# EAGLE board ESP32 Display 2.8 inch V1.2 (EAGLE 9.5.1), part 1 of 2
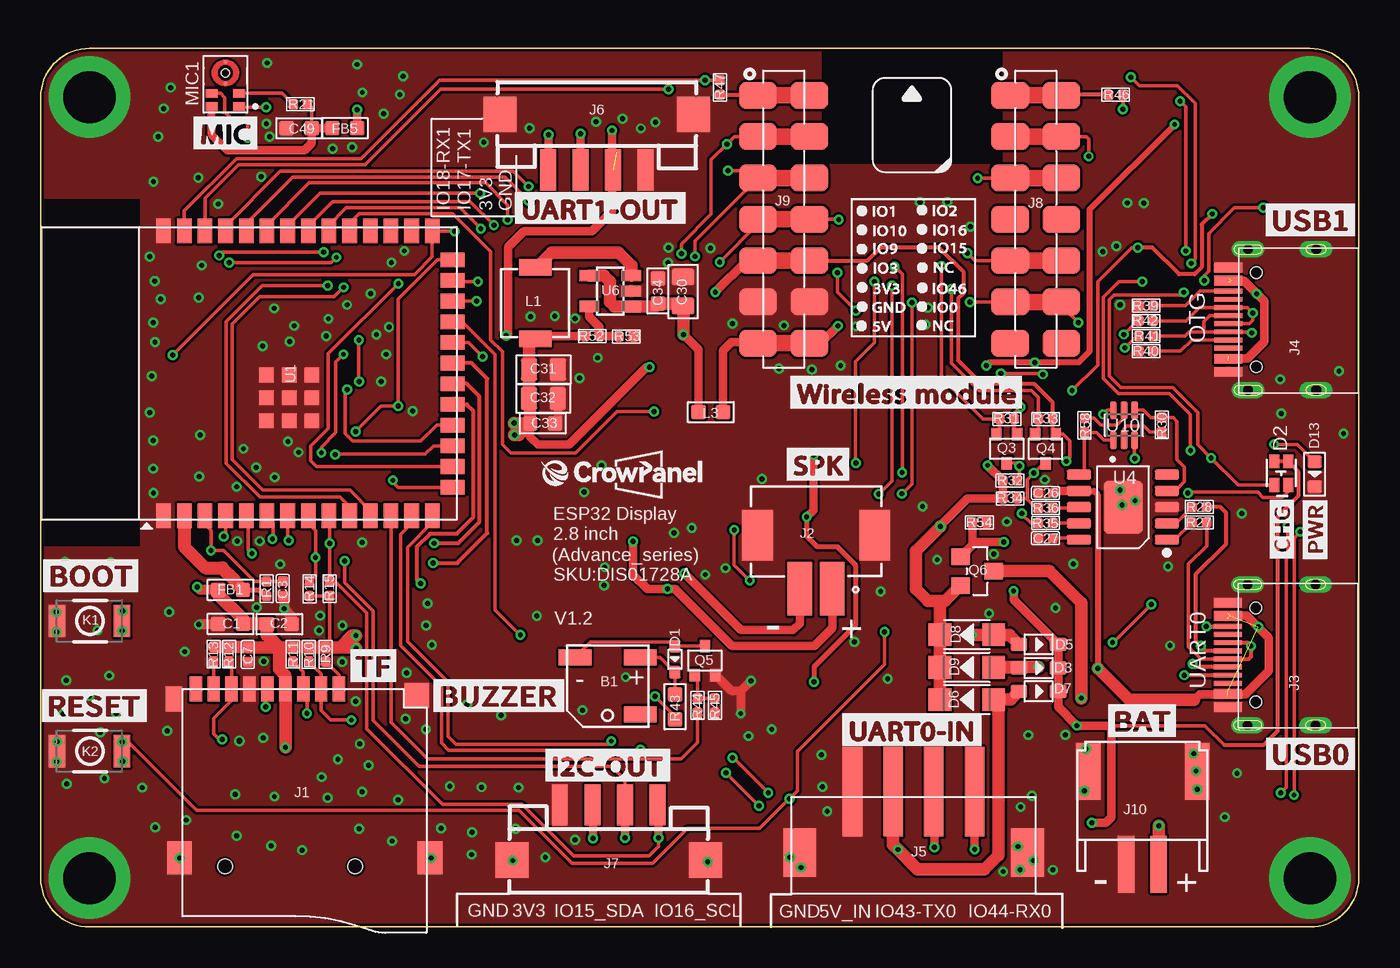
[diagram p0: board, top side]
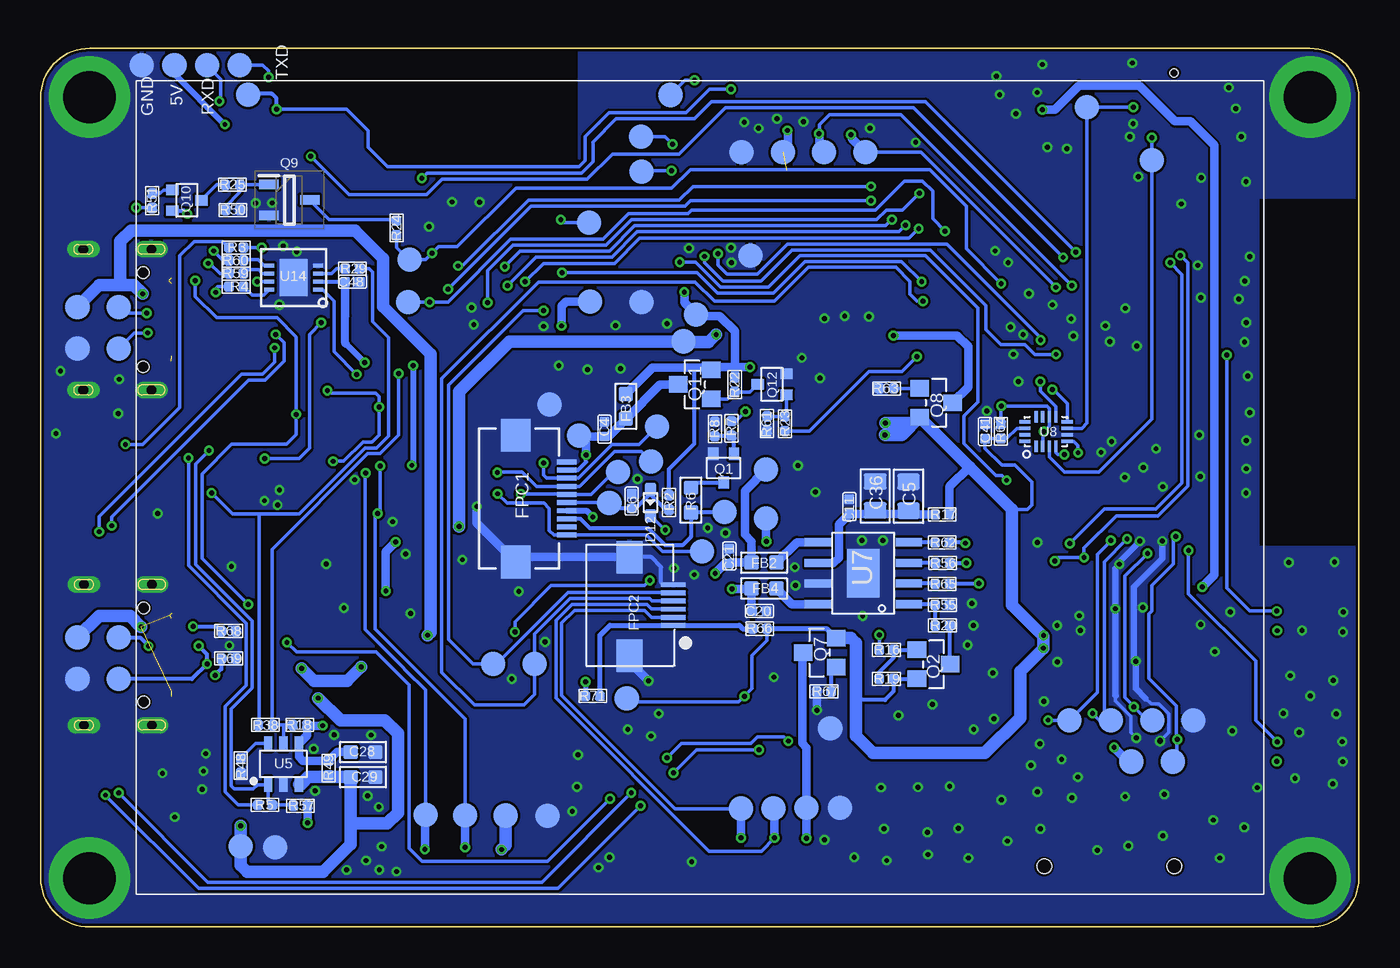
[diagram p1: board, bottom side, seen from below]

Size 81 x 54 mm. Coordinates in mm from the lower left corner, seen from the top.
Outline: 0,51 0,3 arc90 3,0 78,0 arc90 81,3 81,51 arc90 78,54 3,54 arc90 0,51
Copper layers (1*16): Top 0.035mm / dielectric 1.5mm / Bottom 0.035mm
Design rules "default": minimum track width 8mil, minimum drill 0.3mm, track to track 6mil, track to pad 6mil, pad to pad 4mil, via to via 6mil, smd to smd 6mil, copper to edge 6mil, drill to drill 4mil, minimum pad ring 6mil, minimum via ring 6mil, stop-mask expansion 4mil, vias tented up to drill 100mil, thermal gap 0mil
tRestrict: area 0.1,23.4 to 6.1,44.7; area 48,46.9 to 59.1,54
bRestrict: area 0.1,23.4 to 6.1,44.7; area 48,46.9 to 59.1,54

## Footprints (pad centres in the part's own frame; a part is rotated, then mirrored left to right if it is on the bottom)
BEEP_5025 = smd 2 x 1: 1 -2,-1.75; 2 2,-1.75; 3 -2,1.75
C0603 = smd 0.889 x 0.889: 1 -0.762,0; 2 0.762,0
C0402 = smd 0.6 x 0.6: 1 -0.45,0; 2 0.45,0
C0805 = smd 1.016 x 1.397: 1 -0.889,0; 2 0.889,0
D_SOD523 = smd 0.762 x 0.7: + -0.8,0; - 0.8,0
LED_KT-0603RYG = smd 0.85 x 0.6: 1 0.725,-0.425; 2 0.725,0.425; 3 -0.725,-0.425; 4 -0.725,0.425
D_SOD323 = smd 1 x 0.8: + -1.2,0; - 1.2,0
D_SOD123FL = smd 1.397 x 1.397: + -1.651,0; - 1.651,0
LED0603 = smd 0.762 x 0.889: + -0.762,0; - 0.762,0
L0603 = smd 0.889 x 0.889: 1 -0.762,0; 2 0.762,0
FPC-P0.5MM-10P-SMD = smd 0.3 x 1.2: P$1 2.25,-1.574; P$2 1.75,-1.574; P$3 1.25,-1.574; P$4 0.75,-1.574; P$5 0.25,-1.574; P$6 -0.25,-1.574; P$7 -0.75,-1.574; P$8 -1.25,-1.574; P$9 -1.75,-1.574; P$10 -2.25,-1.574 | smd 2 x 1.8: P$11 3.9,1.576; P$12 -3.9,1.576
FPC-6PIN-0.5MM_2 = smd 0.3 x 1.5: 1 1.183,2.184; 2 0.683,2.184; 3 0.183,2.184; 4 -0.317,2.184; 5 -0.817,2.184; 6 -1.317,2.184 | smd 2 x 1.6: 7 -3.01,-0.496; 8 3.036,-0.496
9P-SMD-W/-RING = smd 1.524 x 0.762: 1 0,4.4; 2 0,3.3; 3 0,2.2; 4 0,1.1; 5 0,0; 6 0,-1.1; 7 0,-2.2; 8 0,-3.3; 9 0,-4.4 | smd 1.524 x 1.016: G1 0.6,-5.746 | smd 2.032 x 1.524: G2 10.373,-5.4; G3 10.373,10 | smd 1.524 x 1.524: G4 0.392,9.181 | hole 0.889: 10.9,-2.6; 10.9,5.4
CONN-TH_2P-P2.00_XUNPU_WAFER-PH2.0-2PLB = smd 1.5 x 3.3: 1 -1,1.65; 2 1,1.65 | smd 1.9 x 3.1: 3 3.6,-1.65; 4 -3.6,-1.65
USB-3.0TYPEC-SMD = smd 0.3 x 1.7: A1 -3.35,0.5; A4 -2.55,0.5; A5 -1.25,0.5; A6 -0.25,0.5; A7 0.25,0.5; A8 1.25,0.5; A9 2.55,0.5; A12 3.35,0.5; B1 3.05,0.5; B4 2.25,0.5; B5 1.75,0.5; B6 0.75,0.5; B7 -0.75,0.5; B8 -1.75,0.5; B9 -2.25,0.5; B12 -3.05,0.5 | drill 0.6 pad 1.016 long: P$1 -4.325,-0.72; P$2 4.325,-0.72; P$3 -4.325,-4.9; P$4 4.325,-4.9 | hole 0.68: -2.89,-1.22; 2.89,-1.22
XH2.54-4P-SMD = smd 1.2 x 5.5: 1 -3.75,-1.875; 2 -1.25,-1.875; 3 1.25,-1.875; 4 3.75,-1.875 | smd 2 x 3: 5 -7,1.875; 6 7,1.875
CONNECTOR_4P-SMD-2.0 = smd 0.965 x 2.54: 1 -3,0; 2 -1,0; 3 1,0; 4 3,0 | smd 2.032 x 2.184: SS1 -5.946,3.4; SS2 5.946,3.4
H7-2.54-18.28X2.5X5MM = smd 1.65 x 2.3: 1 -7.62,-1.58; 1-1 -7.62,1.58; 2 -5.08,-1.58; 2-2 -5.08,1.58; 3 -2.54,-1.58; 3-3 -2.54,1.58; 4 0,-1.58; 4-4 0,1.58; 5 2.54,-1.58; 5-5 2.54,1.58; 6 5.08,-1.58; 6-6 5.08,1.58; 7 7.62,-1.58; 7-7 7.62,1.58
PH2.0WT-2PIN = smd 1 x 3.5: P$1 -1,0; P$2 1,0 | smd 1.5 x 3.5: P$3 -3.35,-5.7; P$4 3.35,-5.7
TEST-PIN-4-2.0MM = smd 1.5 x 1.5: 1 -3,0; 2 -1,0; 3 1,0; 4 3,0
THO-M3.2*5MM-HOLE = drill 3.2 pad 5: P$1 0,0
157SW = smd 1.016 x 1.981: 1 0,0; 2 4,0
L0420 = smd 2 x 1: 1 0,2.2; 2 0,-2.2
MIC-SMD_5P-L3.5-W2.7-P1.67 = smd 0.725 x 0.522: 1 -0.838,1.362; 2 -0.838,0.542; 3 0.838,0.542; 4 0.838,1.362 | smd 0.25 x 0.25: 5_1 0,-0.048; 5_2 0,-1.373 | hole 0.5: 0,-0.71
TEST_PAD-1.5MM = smd 1.5 x 1.5: P$1 0,0
MOS_SOT323 = smd 0.635 x 0.762: 1 -0.635,-0.889; 2 0.635,-0.889; 3 0,0.889
PMOS_SOT23 = smd 1.016 x 1.143: 1 -0.889,-1.016; 2 0.889,-1.016; 3 0,1.016
SOT95P280X125-3N = smd 1.2 x 0.6: 1 -1.25,0.95; 2 -1.25,-0.95; 3 1.25,0
R0402 = smd 0.635 x 0.635: 1 -0.445,0; 2 0.445,0
R0603-SP = smd 0.889 x 0.889: 1 -0.762,0; 2 0.762,0
ESP32-S3-WROOM-1-SMD41 = smd 1.5 x 0.9: 1 -8.75,5.26; 2 -8.75,3.99; 3 -8.75,2.72; 4 -8.75,1.45; 5 -8.75,0.18; 6 -8.75,-1.09; 7 -8.75,-2.36; 8 -8.75,-3.63; 9 -8.75,-4.9; 10 -8.75,-6.17; 11 -8.75,-7.44; 12 -8.75,-8.71; 13 -8.75,-9.98; 14 -8.75,-11.25; 27 8.75,-11.25; 28 8.75,-9.98; 29 8.75,-8.71; 30 8.75,-7.44; 31 8.75,-6.17; 32 8.75,-4.9; 33 8.75,-3.63; 34 8.75,-2.36; 35 8.75,-1.09; 36 8.75,0.18; 37 8.75,1.45; 38 8.75,2.72; 39 8.75,3.99; 40 8.75,5.26 | smd 0.9 x 1.5: 15 -6.985,-12.5; 16 -5.715,-12.5; 17 -4.445,-12.5; 18 -3.175,-12.5; 19 -1.905,-12.5; 20 -0.635,-12.5; 21 0.635,-12.5; 22 1.905,-12.5; 23 3.175,-12.5; 24 4.445,-12.5; 25 5.715,-12.5; 26 6.985,-12.5 | smd 0.9 x 0.9: 41 -2.9,-1.06; 42 -1.5,-1.06; 43 -0.1,-1.06; 44 -2.9,-2.46; 45 -1.5,-2.46; 46 -0.1,-2.46; 47 -2.9,-3.86; 48 -1.5,-3.86; 49 -0.1,-3.86
ESOP-10-EP-150MIL = smd 1.5 x 0.6: 1 -2.7,2; 2 -2.7,1; 3 -2.7,0; 4 -2.7,-1; 5 -2.7,-2; 6 2.7,-2; 7 2.7,-1; 8 2.7,0; 9 2.7,1; 10 2.7,2 | smd 2.4 x 3.2: EP 0,0
SOT23-6L = smd 0.5 x 0.9: 1 -0.961,-1.212; 2 -0.011,-1.212; 3 0.94,-1.212; 4 0.94,1.288; 5 -0.011,1.288; 6 -0.961,1.288
IC_SOT23-5 = smd 0.69 x 1.2: 1 -0.95,-1.3; 2 0,-1.3; 3 0.95,-1.3; 4 0.95,1.3; 5 -0.95,1.3
NS4168-ESOP-8 = smd 1.6 x 0.5: 1 -2.8,1.905; 2 -2.8,0.635; 3 -2.8,-0.635; 4 -2.8,-1.905; 5 2.8,-1.905; 6 2.8,-0.635; 7 2.8,0.635; 8 2.8,1.905 | smd 2 x 3: 9 0,0
IC_SGM3799_TQFN2.6X1.8_16L = smd 0.2 x 0.7: 1 -0.6,-0.9; 2 -0.2,-0.9; 3 0.2,-0.9; 4 0.6,-0.9; 9 0.6,0.9; 10 0.2,0.9; 11 -0.2,0.9; 12 -0.6,0.9 | smd 0.7 x 0.2: 5 1.3,-0.6; 6 1.3,-0.2; 7 1.3,0.2; 8 1.3,0.6; 13 -1.3,0.6; 14 -1.3,0.2; 15 -1.3,-0.2; 16 -1.3,-0.6
SOP65P210X100-6N = smd 1.09 x 0.4: 1 -0.92,0.65; 2 -0.92,0; 3 -0.92,-0.65; 4 0.92,-0.65; 5 0.92,0; 6 0.92,0.65
DFN8 = smd 0.61 x 0.25: 1 -1.5,0.75; 2 -1.5,0.25; 3 -1.5,-0.25; 4 -1.5,-0.75; 5 1.5,-0.75; 6 1.5,-0.25; 7 1.5,0.25; 8 1.5,0.75 | smd 1.7 x 2.3: P$9 0,0

## Placement (x,y rotation side)
B1  BEEP_5025  [BEEP_5025]  34.84,14.81 180 top
C1  10uF/0603  [C0603]  11.67,18.62 0 top
C2  100nF/0603  [C0603]  14.67,18.61 180 top
C3  1uF  [C0402]  14.88,20.79 90 top
C4  100nF  [C0402]  46.35,30.59 270 bottom
C5  47uF/0805  [C0805]  27.67,26.47 90 bottom
C6  1uF  [C0402]  44.68,26.17 270 bottom
C7  1uF  [C0402]  12.73,16.74 90 top
C11  100nF  [C0402]  31.31,25.83 90 bottom
C20  1nF  [C0402]  36.83,19.41 180 bottom
C21  1nF  [C0402]  38.68,22.79 270 bottom
C26  1uF  [C0402]  61.75,26.67 0 top
C27  1uF  [C0402]  61.75,23.89 0 top
C28  1uF/0603  [C0603]  61.2,10.75 180 bottom
C29  10uF/0603/NC  [C0603]  61.19,9.21 180 bottom
C30  22uF/0805  [C0805]  39.47,39.05 270 top
C31  22uF/0805  [C0805]  30.9,34.25 180 top
C32  22uF/0805  [C0805]  30.89,32.48 180 top
C33  1uF/0603  [C0603]  30.85,30.95 180 top
C34  1uF/0603  [C0603]  37.93,39.08 270 top
C36  47uF/0805  [C0805]  29.72,26.49 90 bottom
C41  1uF  [C0402]  22.97,30.45 270 bottom
C48  1uF  [C0402]  61.84,39.65 180 bottom
C49  100nF  [C0603]  15.88,49.09 0 top
D1  B5819WT  [D_SOD523]  38.97,16.45 270 top
D2  KT-0603RYG  [LED_KT-0603RYG]  76.23,27.89 90 top
D3  1N5817WS  [D_SOD323]  61.32,15.91 0 top
D5  1N5817WS  [D_SOD323]  61.32,17.36 0 top
D6  DSS34  [D_SOD123FL]  56.91,13.97 180 top
D7  1N5817WS  [D_SOD323]  61.32,14.48 0 top
D8  DSS34  [D_SOD123FL]  56.91,17.96 180 top
D9  DSS34  [D_SOD123FL]  56.91,15.95 180 top
D12  B5819WT  [D_SOD523]  43.53,26.08 270 bottom
D13  Red  [LED0603]  78.29,27.82 270 top
FB1  0R/800mA  [L0603]  11.67,20.71 0 top
FB2  1K/300mA  [L0603]  36.55,22.39 180 bottom
FB3  0R/800mA  [L0603]  45.04,31.99 270 bottom
FB4  1K/300mA  [L0603]  36.55,20.8 180 bottom
FB5  0R/800mA  [L0603]  18.69,49.09 180 top
FPC1  TFT-2.4/2.8LCD-SPI-10P  [FPC-P0.5MM-10P-SMD]  50.23,26.33 90 bottom
FPC2  FPC-6PIN-0.5MMFPC-6PIN-0.5MM_2  [FPC-6PIN-0.5MM_2]  44.31,19.72 270 bottom
J1  [9P-SMD-W/-RING]  13.93,14.62 270 top
J2  WAFER-PH2.0-2PLB  [CONN-TH_2P-P2.00_XUNPU_WAFER-PH2.0-2PLB]  47.65,22.43 180 top
J3  TYPEC-3.0-16P-SMD  [USB-3.0TYPEC-SMD]  73.45,16.72 90 top
J4  TYPEC-3.0-16P-SMD  [USB-3.0TYPEC-SMD]  73.48,37.32 90 top
J5  XH2.54-4P-SMT  [XH2.54-4P-SMD]  53.63,6.44 180 top
J6  HY2.0-4P-SMT  [CONNECTOR_4P-SMD-2.0]  34.17,46.52 0 top
J7  HY2.0-4P-SMT  [CONNECTOR_4P-SMD-2.0]  34.91,7.51 180 top
J8  [H7-2.54-18.28X2.5X5MM]  61.15,43.49 270 top
J9  [H7-2.54-18.28X2.5X5MM]  45.66,43.49 270 top
J10  PH2.0WT-2PIN  [PH2.0WT-2PIN]  67.7,3.86 180 top
J11  HC-PZ200-8.7L-1X4PZ1  [TEST-PIN-4-2.0MM]  71.78,52.97 180 bottom
J12  THO-M3.25MM-HOLE  [THO-M3.2*5MM-HOLE]  3,3 0 bottom
J13  THO-M3.25MM-HOLE  [THO-M3.2*5MM-HOLE]  78,3 0 top
J14  THO-M3.25MM-HOLE  [THO-M3.2*5MM-HOLE]  78,51 0 top
J15  THO-M3.25MM-HOLE  [THO-M3.2*5MM-HOLE]  3,51 0 top
K1  BUTTON  [157SW]  1,18.8 0 top
K2  BUTTON  [157SW]  1,10.8 0 top
L1  4.7uH/3A  [L0420]  30.38,38.34 0 top
L3  NC  [L0603]  41.18,31.64 180 top
MIC1  LMD3526B261-OFA01  [MIC-SMD_5P-L3.5-W2.7-P1.67]  11.35,51.78 180 top
P1  TEST_PADPAD-1.5MM  [TEST_PAD-1.5MM]  44.98,14.05 270 bottom
P2  TEST_PADPAD-1.5MM  [TEST_PAD-1.5MM]  35.96,7.3 270 bottom
P3  TEST_PADPAD-1.5MM  [TEST_PAD-1.5MM]  37.96,7.27 270 bottom
P4  TEST_PADPAD-1.5MM  [TEST_PAD-1.5MM]  50.66,16.17 90 bottom
P5  TEST_PADPAD-1.5MM  [TEST_PAD-1.5MM]  53.2,16.17 90 bottom
P6  TEST_PADPAD-1.5MM  [TEST_PAD-1.5MM]  32.48,12.21 270 bottom
P7  TEST_PADPAD-1.5MM  [TEST_PAD-1.5MM]  47.92,30.19 0 bottom
P8  TEST_PADPAD-1.5MM  [TEST_PAD-1.5MM]  46.06,26.06 0 bottom
P9  TEST_PADPAD-1.5MM  [TEST_PAD-1.5MM]  43.49,28.62 0 bottom
P10  TEST_PADPAD-1.5MM  [TEST_PAD-1.5MM]  40.36,23.07 0 bottom
P11  TEST_PADPAD-1.5MM  [TEST_PAD-1.5MM]  45.52,27.95 0 bottom
P12  TEST_PADPAD-1.5MM  [TEST_PAD-1.5MM]  43.12,30.75 0 bottom
P13  TEST_PADPAD-1.5MM  [TEST_PAD-1.5MM]  47.3,43.29 180 bottom
P14  TEST_PADPAD-1.5MM  [TEST_PAD-1.5MM]  44.07,46.43 180 bottom
P15  TEST_PADPAD-1.5MM  [TEST_PAD-1.5MM]  38.99,25.5 0 bottom
P16  TEST_PADPAD-1.5MM  [TEST_PAD-1.5MM]  49.72,32.12 0 bottom
P17  TEST_PADPAD-1.5MM  [TEST_PAD-1.5MM]  13.97,10.16 0 bottom
P18  TEST_PADPAD-1.5MM  [TEST_PAD-1.5MM]  33.94,7.31 0 bottom
P19  TEST_PADPAD-1.5MM  [TEST_PAD-1.5MM]  17.78,12.7 0 bottom
P20  TEST_PADPAD-1.5MM  [TEST_PAD-1.5MM]  15.24,12.7 0 bottom
P21  TEST_PADPAD-1.5MM  [TEST_PAD-1.5MM]  12.7,12.7 0 bottom
P22  TEST_PADPAD-1.5MM  [TEST_PAD-1.5MM]  11.43,10.16 0 bottom
P23  TEST_PADPAD-1.5MM  [TEST_PAD-1.5MM]  44.1,48.58 180 bottom
P24  TEST_PADPAD-1.5MM  [TEST_PAD-1.5MM]  10.16,12.7 0 bottom
P26  TEST_PADPAD-1.5MM  [TEST_PAD-1.5MM]  16.7,50.37 0 bottom
P27  TEST_PADPAD-1.5MM  [TEST_PAD-1.5MM]  12.73,47.13 0 bottom
P28  TEST_PADPAD-1.5MM  [TEST_PAD-1.5MM]  36.42,28.12 0 bottom
P30  TEST_PADPAD-1.5MM  [TEST_PAD-1.5MM]  36.42,25.1 0 bottom
P31  TEST_PADPAD-1.5MM  [TEST_PAD-1.5MM]  58.42,38.41 180 bottom
P32  TEST_PADPAD-1.5MM  [TEST_PAD-1.5MM]  58.34,41 180 bottom
P34  TEST_PADPAD-1.5MM  [TEST_PAD-1.5MM]  31.9,7.31 0 bottom
P36  TEST_PADPAD-1.5MM  [TEST_PAD-1.5MM]  35.4,47.61 0 bottom
P37  TEST_PADPAD-1.5MM  [TEST_PAD-1.5MM]  37.94,47.61 0 bottom
P38  TEST_PADPAD-1.5MM  [TEST_PAD-1.5MM]  32.86,47.61 0 bottom
P39  TEST_PADPAD-1.5MM  [TEST_PAD-1.5MM]  30.32,47.61 0 bottom
P40  TEST_PADPAD-1.5MM  [TEST_PAD-1.5MM]  52.42,6.84 0 bottom
P41  TEST_PADPAD-1.5MM  [TEST_PAD-1.5MM]  49.85,6.83 0 bottom
P42  TEST_PADPAD-1.5MM  [TEST_PAD-1.5MM]  54.92,6.86 0 bottom
P43  TEST_PADPAD-1.5MM  [TEST_PAD-1.5MM]  57.34,6.88 0 bottom
P44  TEST_PADPAD-1.5MM  [TEST_PAD-1.5MM]  78.74,38.1 0 bottom
P45  TEST_PADPAD-1.5MM  [TEST_PAD-1.5MM]  76.2,35.56 0 bottom
P46  TEST_PADPAD-1.5MM  [TEST_PAD-1.5MM]  76.2,38.1 0 bottom
P47  TEST_PADPAD-1.5MM  [TEST_PAD-1.5MM]  78.74,35.56 0 bottom
P48  TEST_PADPAD-1.5MM  [TEST_PAD-1.5MM]  78.74,17.78 0 bottom
P49  TEST_PADPAD-1.5MM  [TEST_PAD-1.5MM]  76.2,17.78 0 bottom
P50  TEST_PADPAD-1.5MM  [TEST_PAD-1.5MM]  76.2,15.24 0 bottom
P51  TEST_PADPAD-1.5MM  [TEST_PAD-1.5MM]  78.74,15.24 0 bottom
P52  TEST_PADPAD-1.5MM  [TEST_PAD-1.5MM]  68.72,4.97 0 bottom
P53  TEST_PADPAD-1.5MM  [TEST_PAD-1.5MM]  66.58,4.91 0 bottom
P54  TEST_PADPAD-1.5MM  [TEST_PAD-1.5MM]  41.5,35.99 0 bottom
P55  TEST_PADPAD-1.5MM  [TEST_PAD-1.5MM]  37.38,41.25 0 bottom
P58  TEST_PADPAD-1.5MM  [TEST_PAD-1.5MM]  68.26,51.16 0 bottom
P59  TEST_PADPAD-1.5MM  [TEST_PAD-1.5MM]  42.3,51.13 0 bottom
P60  TEST_PADPAD-1.5MM  [TEST_PAD-1.5MM]  44.07,38.4 0 bottom
P61  TEST_PADPAD-1.5MM  [TEST_PAD-1.5MM]  40.73,37.63 0 bottom
P62  TEST_PADPAD-1.5MM  [TEST_PAD-1.5MM]  47.23,38.43 0 bottom
Q1  SS8050W-SOT323  [MOS_SOT323]  39.03,28.2 180 bottom
Q2  AO3401  [PMOS_SOT23]  26.14,16.14 270 bottom
Q3  BSS138W_SOT323  [MOS_SOT323]  59.37,29.39 180 top
Q4  BSS138W_SOT323  [MOS_SOT323]  61.75,29.39 180 top
Q5  SS8050W-SOT323  [MOS_SOT323]  40.82,16.37 0 top
Q6  AO3401  [PMOS_SOT23]  57.55,21.87 270 top
Q7  AO3401  [PMOS_SOT23]  33.13,16.87 90 bottom
Q8  AO3401  [PMOS_SOT23]  25.98,32.22 270 bottom
Q9  AO3400A  [SOT95P280X125-3N]  65.72,44.68 0 bottom
Q10  SS8550W-SOT323  [MOS_SOT323]  72.02,44.66 270 bottom
Q11  AO3401/NC  [PMOS_SOT23]  40.8,33.34 90 bottom
Q12  SS8050W-SOT323//NC  [MOS_SOT323]  36.06,33.35 90 bottom
R1  10K  [R0402]  13.88,20.79 270 top
R2  10K  [R0402]  42.39,26.09 90 bottom
R3  5.1K  [R0402]  68.99,41.76 0 bottom
R4  5.1K  [R0402]  68.99,39.36 180 bottom
R5  NC  [R0402]  67.21,7.5 180 bottom
R6  6.8R/0603  [R0603-SP]  41.04,26.23 270 bottom
R7  1K  [R0402]  38.55,30.64 90 bottom
R8  47K  [R0402]  39.57,30.61 90 bottom
R9  10K  [R0402]  17.51,16.75 90 top
R10  10K  [R0402]  16.48,16.75 90 top
R11  10K  [R0402]  15.5,16.76 90 top
R12  10K  [R0402]  11.57,16.77 90 top
R13  10K  [R0402]  10.62,16.77 90 top
R14  4.7k  [R0402]  16.52,20.77 270 top
R15  4.7k  [R0402]  17.75,20.79 270 top
R16  100R  [R0402]  29.03,17.03 0 bottom
R17  0R  [R0402]  25.6,25.35 180 bottom
R18  5.1K  [R0402]  65.07,12.41 180 bottom
R19  10K  [R0402]  29.03,15.25 0 bottom
R20  1K  [R0402]  25.59,18.52 180 bottom
R21  10K/NC  [R0402]  15.96,50.56 0 top
R22  100K/NC  [R0402]  38.35,33.33 90 bottom
R23  1K/NC  [R0402]  35.27,30.93 270 bottom
R24  100R  [R0402]  59.14,42.97 270 bottom
R25  100R  [R0402]  69.21,45.61 180 bottom
R27  0R  [R0402]  71.2,24.85 0 top
R28  0R  [R0402]  71.2,25.8 0 top
R29  2K  [R0402]  61.84,40.46 0 bottom
R30  10K  [R0402]  68.9,30.86 90 top
R31  4.7k  [R0402]  59.37,31.23 0 top
R32  4.7k  [R0402]  59.56,27.45 180 top
R33  4.7k  [R0402]  61.75,31.23 0 top
R34  4.7k  [R0402]  59.57,26.34 180 top
R35  0R  [R0402]  61.75,24.82 0 top
R36  0R  [R0402]  61.75,25.75 0 top
R38  NC  [R0402]  67.18,12.4 180 bottom
R39  5.1K  [R0402]  67.93,38.18 0 top
R40  5.1K  [R0402]  67.93,35.38 0 top
R41  0R  [R0402]  67.93,36.31 0 top
R42  0R  [R0402]  67.92,37.25 0 top
R43  3.9R/0603  [R0603-SP]  38.98,13.53 270 top
R44  1K  [R0402]  40.36,13.61 270 top
R45  47K  [R0402]  41.42,13.61 270 top
R46  0R  [R0402]  66.05,51.14 0 top
R47  0R  [R0402]  41.74,51.6 90 top
R48  2K  [R0402]  68.7,9.91 90 bottom
R49  5.1K  [R0402]  63.31,9.77 90 bottom
R50  10K  [R0402]  69.19,44.06 0 bottom
R51  10K  [R0402]  74.15,44.64 90 bottom
R52  45.3K  [R0402]  33.9,36.32 180 top
R53  10K  [R0402]  35.98,36.29 180 top
R54  10K  [R0402]  57.69,24.86 180 top
R55  100K  [R0402]  25.59,19.8 0 bottom
R56  0R  [R0402]  25.57,22.36 0 bottom
R57  5.1K  [R0402]  65.04,7.45 180 bottom
R58  10K  [R0402]  64.14,30.84 270 top
R59  0R  [R0402]  68.98,40.16 0 bottom
R60  0R  [R0402]  68.99,40.96 0 bottom
R61  47K/NC  [R0402]  36.36,30.94 270 bottom
R62  0R  [R0402]  25.6,23.62 0 bottom
R63  10K  [R0402]  29.02,33.1 0 bottom
R64  10K/NC  [R0402]  21.99,30.46 270 bottom
R65  0R  [R0402]  25.59,21.09 0 bottom
R66  0R/NC  [R0402]  36.82,18.33 0 bottom
R67  10K  [R0402]  32.86,14.46 0 bottom
R68  5.1K  [R0402]  69.45,18.18 180 bottom
R69  5.1K  [R0402]  69.45,16.49 0 bottom
R71  0R  [R0402]  47.08,14.19 180 bottom
U1  ESP32-S3-WROOM-1  [ESP32-S3-WROOM-1-SMD41]  12.81,34.02 90 top
U4  CH340K  [ESOP-10-EP-150MIL]  66.51,25.8 180 top
U5  TP4059-SOT23-6  [SOT23-6L]  66.07,9.98 0 bottom
U6  RY3420  [IC_SOT23-5]  35,39.09 90 top
U7  NS4168-ESOP-8  [NS4168-ESOP-8]  30.45,21.74 180 bottom
U8  SGM3799  [IC_SGM3799_TQFN2.6X1.8_16L]  19.22,30.45 0 bottom
U10  UMH3NTN  [SOP65P210X100-6N]  66.57,30.84 90 top
U14  STC8G1K08  [DFN8]  65.45,39.91 180 bottom

## Library data of the parts
B1 C1-C7 C11 C20 C21 C26-C34 C36 C41 C48 C49 D1 D3 D5-D9 D12 D13 FB1-FB5 FPC1 FPC2 J1-J10 J12-J15 L1 L3 P1-P24 P26-P28 P30-P32 P34 P36-P55 P58-P62 Q1-Q8 Q10-Q12 R1-R25 R27-R36 R38-R69 R71 U1 U5 U6 = CrowPanel_Advance_HMI
D2 = KT-0603RYG
J11 = Mini PC Case
K1 K2 = MySMD
MIC1 = MMICT5838-00-012
Q9 = AO3400A; ARROW_PART_NUMBER: AO3400A; ARROW_PRICE-STOCK: https://www.arrow.com/en/products/ao3400a/alpha-and-omega-semiconductor?utm_currency=USD&region=nac; DESCRIPTION: 30V N-Channel MOSFET; HEIGHT: 1.25mm; MANUFACTURER_NAME: Alpha & Omega Semiconductors; MANUFACTURER_PART_NUMBER: AO3400A
U4 = sale
U7 = STC_MCUSTC8G1K08A
U8 = cooper
U10 = UMH3NTN; AVAILABILITY: In Stock; CHECK_PRICES: https://www.snapeda.com/parts/UMH3NTN/Rohm/view-part/?ref=eda; DESCRIPTION: Pre-Biased Bipolar Transistor (BJT) 2 NPN - Pre-Biased (Dual) 50V 100mA 250MHz 150mW Surface Mount UMT6; MF: Rohm; MP: UMH3NTN; PACKAGE: SOT-363 Rohm; PRICE: None; PURCHASE-URL: https://www.snapeda.com/api/url_track_click_mouser/?unipart_id=355768&manufacturer=Rohm&part_name=UMH3NTN&search_term=umh3n; SNAPEDA_LINK: https://www.snapeda.com/parts/UMH3NTN/Rohm/view-part/?ref=snap
U14 = DFN8

## Nets
3V3: C1.2 C2.2 C7.2 C31.2 C32.2 C33.2 C41.2 FB1.1 FB3.1 FB5.1 J1.4 J9.5 J9.5-5 L1.2 P1.P$1 P17.P$1 P61.P$1 Q2.2 Q3.1 Q4.1 Q7.2 Q8.2 Q10.2 Q11.2 R2.2 R3.2 R9.2 R10.2 R11.2 R12.2 R13.2 R14.2 R15.2 R17.1 R19.2 R22.2 R31.2 R33.2 R43.2 R52.2 R64.2 R66.2 U8.14
3V3_1: C49.2 FB5.2 MIC1.4 R21.2
3V3_OUT1: J6.3 P36.P$1 Q8.3
3V3_OUT2: J7.3 P18.P$1 Q7.3
+5V_IN: D6.+ D7.+ J5.3 P40.P$1
+VBUS1: C26.2 D3.+ D9.+ J3.A4 J3.A9 J3.B4 J3.B9 P48.P$1 U4.7
+VBUS2: D5.+ D8.+ J4.A4 J4.A9 J4.B4 J4.B9 P44.P$1
+VC_IN: C28.2 D2.1 D2.2 D3.- D5.- D7.- Q6.1 R18.1 R49.2 R54.2 R57.1 U5.4
C_LED: R4.1 U14.8
CH_EN: C3.2 D12.- K2.2 R1.1 R51.1 U1.3 U10.6
CHRG: R5.1 R57.2 U5.1 U14.7
D_LED: R29.1 U14.3
DA1: J1.8 R13.1
DA2: J1.1 R9.1
DONE: R18.2 R38.1 U5.5 U14.1
DTR: R30.2 U4.4 U10.4
ESP_3V3: FB1.2 R1.2 U1.2
ESP_D+: R42.1 U1.14
ESP_D-: R41.1 U1.13
ESP_RXD0: Q4.2 R33.1 U1.36
ESP_RXD1: J6.1 P39.P$1 U1.11
ESP_RXD2: P58.P$1 R46.2 U1.38
ESP_TXD0: Q3.2 R31.1 U1.37
ESP_TXD1: J6.2 P38.P$1 U1.10
ESP_TXD2: P59.P$1 R47.2 U1.39
GND: C1.1 C2.1 C3.1 C4.1 C5.2 C6.1 C7.1 C11.2 C20.1 C21.1 C26.1 C27.1 C28.1 C29.1 C30.1 C31.1 C32.1 C33.1 C34.1 C36.2 C41.1 C48.1 C49.1 D13.- FPC1.P$1 FPC1.P$11 FPC1.P$12 FPC2.6 FPC2.7 FPC2.8 J1.6 J1.G1 J1.G2 J1.G3 J1.G4 J2.3 J2.4 J3.A1 J3.A12 J3.B1 J3.B12 J3.P$1 J3.P$2 J3.P$3 J3.P$4 J4.A1 J4.A12 J4.B1 J4.B12 J4.P$1 J4.P$2 J4.P$3 J4.P$4 J5.4 J5.5 J5.6 J6.4 J6.SS1 J6.SS2 J7.4 J7.SS1 J7.SS2 J9.6 J9.6-6 J10.P$2 J10.P$3 J10.P$4 J11.4 J12.P$1 J13.P$1 J14.P$1 J15.P$1 K1.1 K2.1 MIC1.5_1 MIC1.5_2 P6.P$1 P16.P$1 P24.P$1 P34.P$1 P37.P$1 P41.P$1 P47.P$1 P51.P$1 P53.P$1 P55.P$1 P60.P$1 Q1.2 Q5.2 Q9.2 Q12.2 R8.2 R39.1 R40.1 R45.2 R48.1 R50.2 R53.1 R54.1 R55.2 R61.2 R63.1 R67.1 R68.1 R69.2 U1.1 U1.40 U1.41 U1.42 U1.43 U1.44 U1.45 U1.46 U1.47 U1.48 U1.49 U4.3 U4.EP U5.2 U6.2 U7.7 U7.9 U8.6 U14.4 U14.P$9
IO0_W_CS: J8.6 J8.6-6 K1.2 P31.P$1 U1.27 U10.3
IO3_W_MOSI: J9.4 J9.4-4 P13.P$1 U1.15
IO4_SD_MISO: J1.7 P22.P$1 R12.1 U1.4
IO5_SD_SCK: J1.5 P21.P$1 U1.5
IO6_SD_MOSI: J1.3 P20.P$1 R11.1 U1.6
IO7_SD_CS: J1.2 P19.P$1 R10.1 U1.7
IO8_BEEP: R44.2 U1.12
IO9: U1.17 U8.4
IO9_MIC_CLK: MIC1.3 P27.P$1 U8.3
IO9_W_MISO: J9.3 J9.3-3 P14.P$1 U8.5
IO10: U1.18 U8.8
IO10_MIC_SD: MIC1.1 P26.P$1 U8.7
IO10_W_CLK: J9.2 J9.2-2 P23.P$1 U8.9
IO11_I2S_LRCLK: R65.2 U1.19
IO12_I2S_SDIN: R62.2 U1.20
IO13_I2S_BCLK: R56.2 U1.21
IO14_TFT_PWR: R23.2 U1.22
IO15_SDA: FPC2.3 J7.2 J8.3 J8.3-3 P2.P$1 R14.1 U1.8
IO16_SCL: FPC2.2 J7.1 J8.2 J8.2-2 P3.P$1 R15.1 U1.9
IO21_NS_CTRL: R16.1 U1.23
IO38_LED_BK: R7.2 U1.31
IO39_TFT_SDA: FPC1.P$3 P12.P$1 U1.32
IO40_TFT_CS: FPC1.P$5 P11.P$1 U1.33
IO41_TFT_RS: FPC1.P$10 P10.P$1 U1.34
IO42_TFT_SCK: FPC1.P$4 P9.P$1 U1.35
IO45_SPISW_ITCHING: R64.1 U1.26 U8.2 U8.10
IO46_BOOT_BUSY: J8.5 J8.5-5 P32.P$1 R24.2 U1.16
IO47_TP_INT: FPC2.4 P4.P$1 U1.24
IO48_TP_RST: FPC2.5 P5.P$1 U1.25
IOT_5V: J9.7 J9.7-7 L3.1 P62.P$1
LED_K: FPC1.P$8 P15.P$1 R6.2
N$1: Q1.3 R6.1
N$2: D13.+ R3.1
N$3: Q1.1 R7.1 R8.1
N$4: D2.3 R29.2 R38.2
N$5: D2.4 R4.2 R5.2
N$6: R20.2 R55.1 U7.1
N$7: MIC1.2 R21.1
N$8: R65.1 U7.2
N$9: Q2.1 R16.2 R19.1
N$10: Q12.1 R23.1 R61.1
N$11: FPC2.1 R66.1 R71.1
N$12: Q9.1 R25.1 R50.1
N$13: Q10.3 R25.2
N$14: R27.1 U4.1
N$15: R28.1 U4.2
N$16: L1.1 U6.3
N$17: R30.1 U10.2
N$18: R58.1 U10.5
N$19: R59.2 U14.6
N$20: C27.2 U4.10
N$21: R60.2 U14.5
N$22: R35.2 U4.9
N$23: R36.2 U4.8
N$24: J9.1 J9.1-1 R47.1
N$25: J4.B5 R39.2
N$26: J4.A5 R40.2
N$27: Q5.1 R44.1 R45.1
N$28: B1.2 D1.+ Q5.3
N$29: B1.1 D1.- R43.1
N$30: Q10.1 R51.2
N$31: R52.1 R53.2 U6.5
N$32: R48.2 U5.6
N$33: J3.A5 R69.1
N$34: J3.B5 R68.2
N$35: Q11.1 Q12.3 R22.1
N$36: J8.1 J8.1-1 R46.1
N$38: Q8.1 R63.2
N$39: Q7.1 R67.2
N$46: R56.1 U7.3
N$47: R62.1 U7.4
N$49: C5.1 C11.1 C36.1 R17.2 U7.6
N$235: Q9.3 R24.1
NS_3V3: Q2.3 R20.1
OTG_D+: J4.A6 J4.B6 P46.P$1 R42.2
OTG_D-: J4.A7 J4.B7 P45.P$1 R41.2
ROUT+: C20.2 FB4.2 J2.1 P30.P$1
ROUT-: C21.2 FB2.2 J2.2 P28.P$1
RTS: R58.2 U4.6 U10.1
RXD: J11.2 R60.1
RXD0_H: J5.1 P43.P$1 Q4.3 R34.1 R36.1
TFT_3V3: C4.2 FB3.2 FPC1.P$2 FPC1.P$7 P7.P$1 Q11.3 R71.2
TFT_RST: C6.2 D12.+ FPC1.P$6 P8.P$1 R2.1
TXD: J11.1 R59.1
TXD0_H: J5.2 P42.P$1 Q3.3 R32.1 R35.1
USB_D+: J3.A6 J3.B6 P49.P$1 R27.2
USB_D-: J3.A7 J3.B7 P50.P$1 R28.2
VBAT: C29.2 J10.P$1 P52.P$1 Q6.3 R49.1 U5.3
VIN: C30.2 C34.2 C48.2 D6.- D8.- D9.- J11.3 L3.2 P54.P$1 Q6.2 R32.2 R34.2 U6.1 U6.4 U14.2
VON: FB2.1 U7.5
VOP: FB4.1 U7.8